# Altium PCB DRUM_IT.PcbDoc
Units mil, origin at the board's own origin, x right, y up, seen from the top; angles counter-clockwise.
Board outline 4080 x 2955 mil, 2 copper layers (Top Layer, Bottom Layer); 63 components, 63 nets, 204 pads, 33 vias.
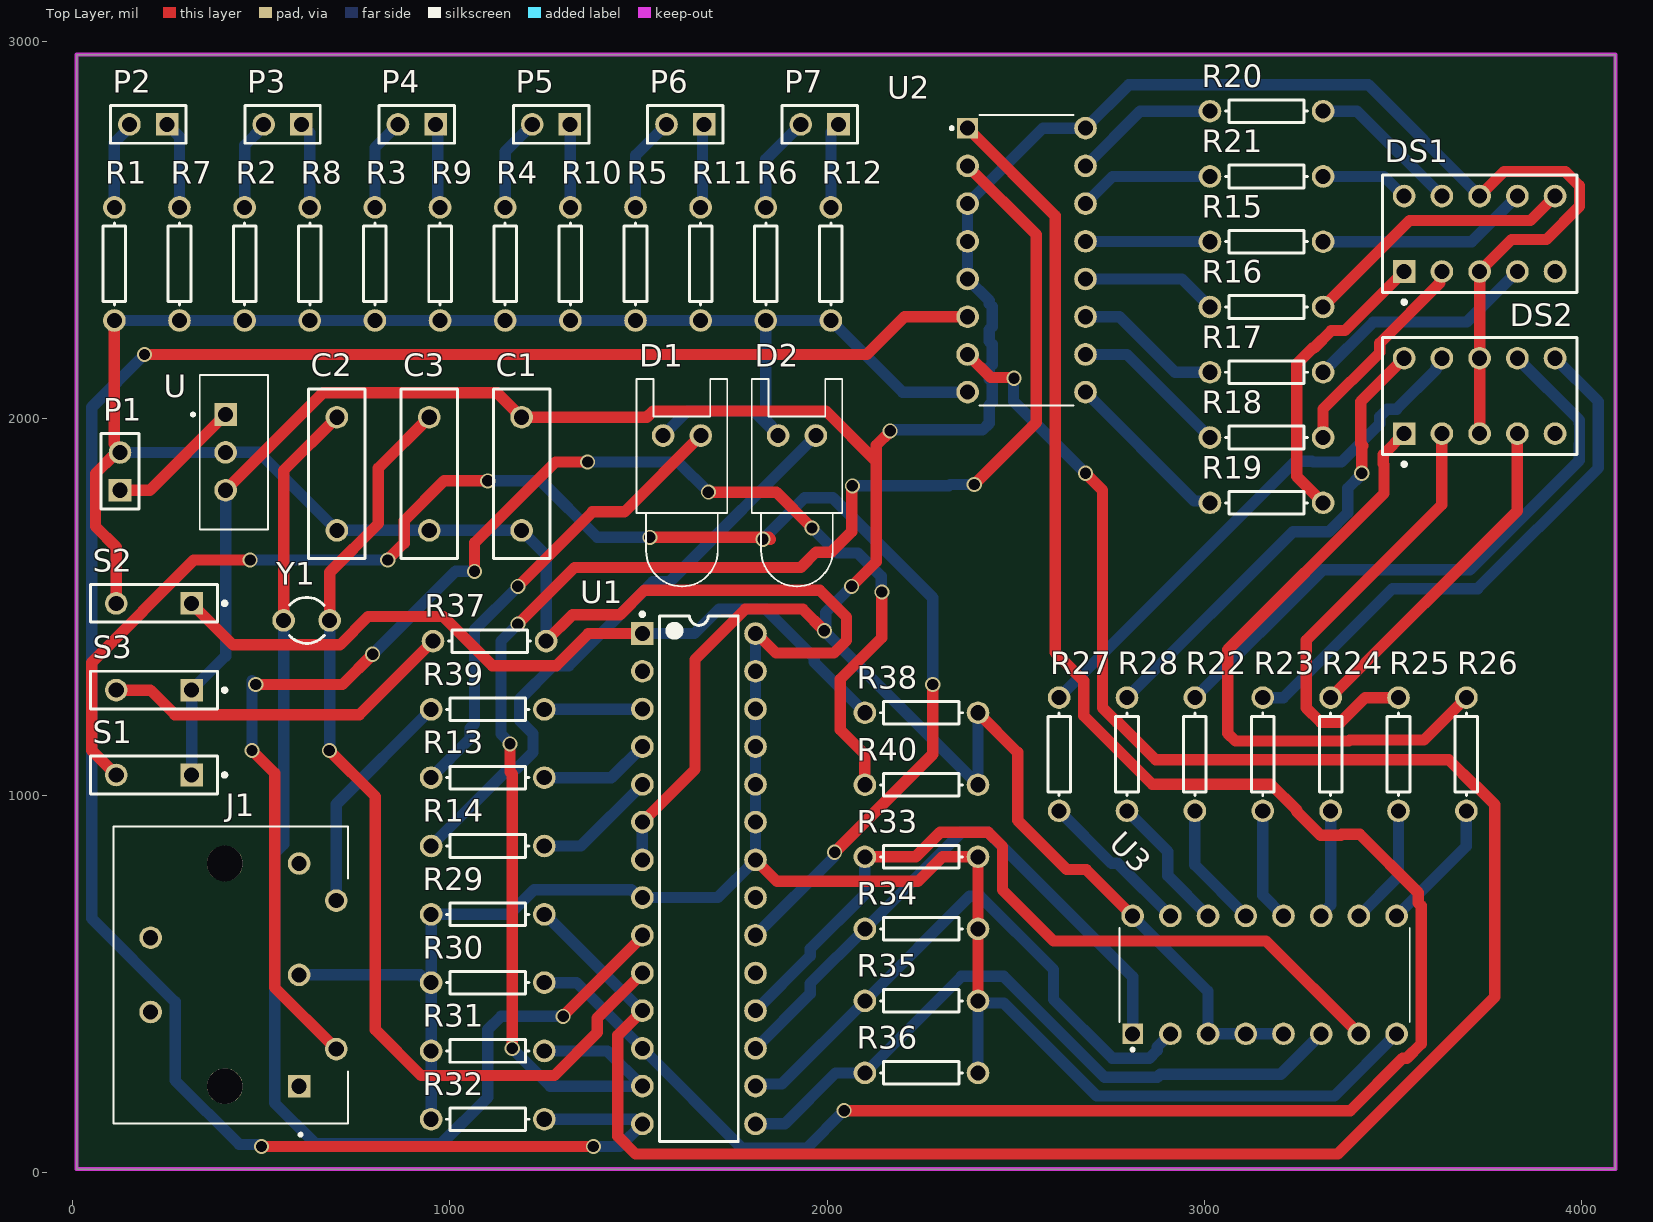
[diagram p0: Top Layer view]
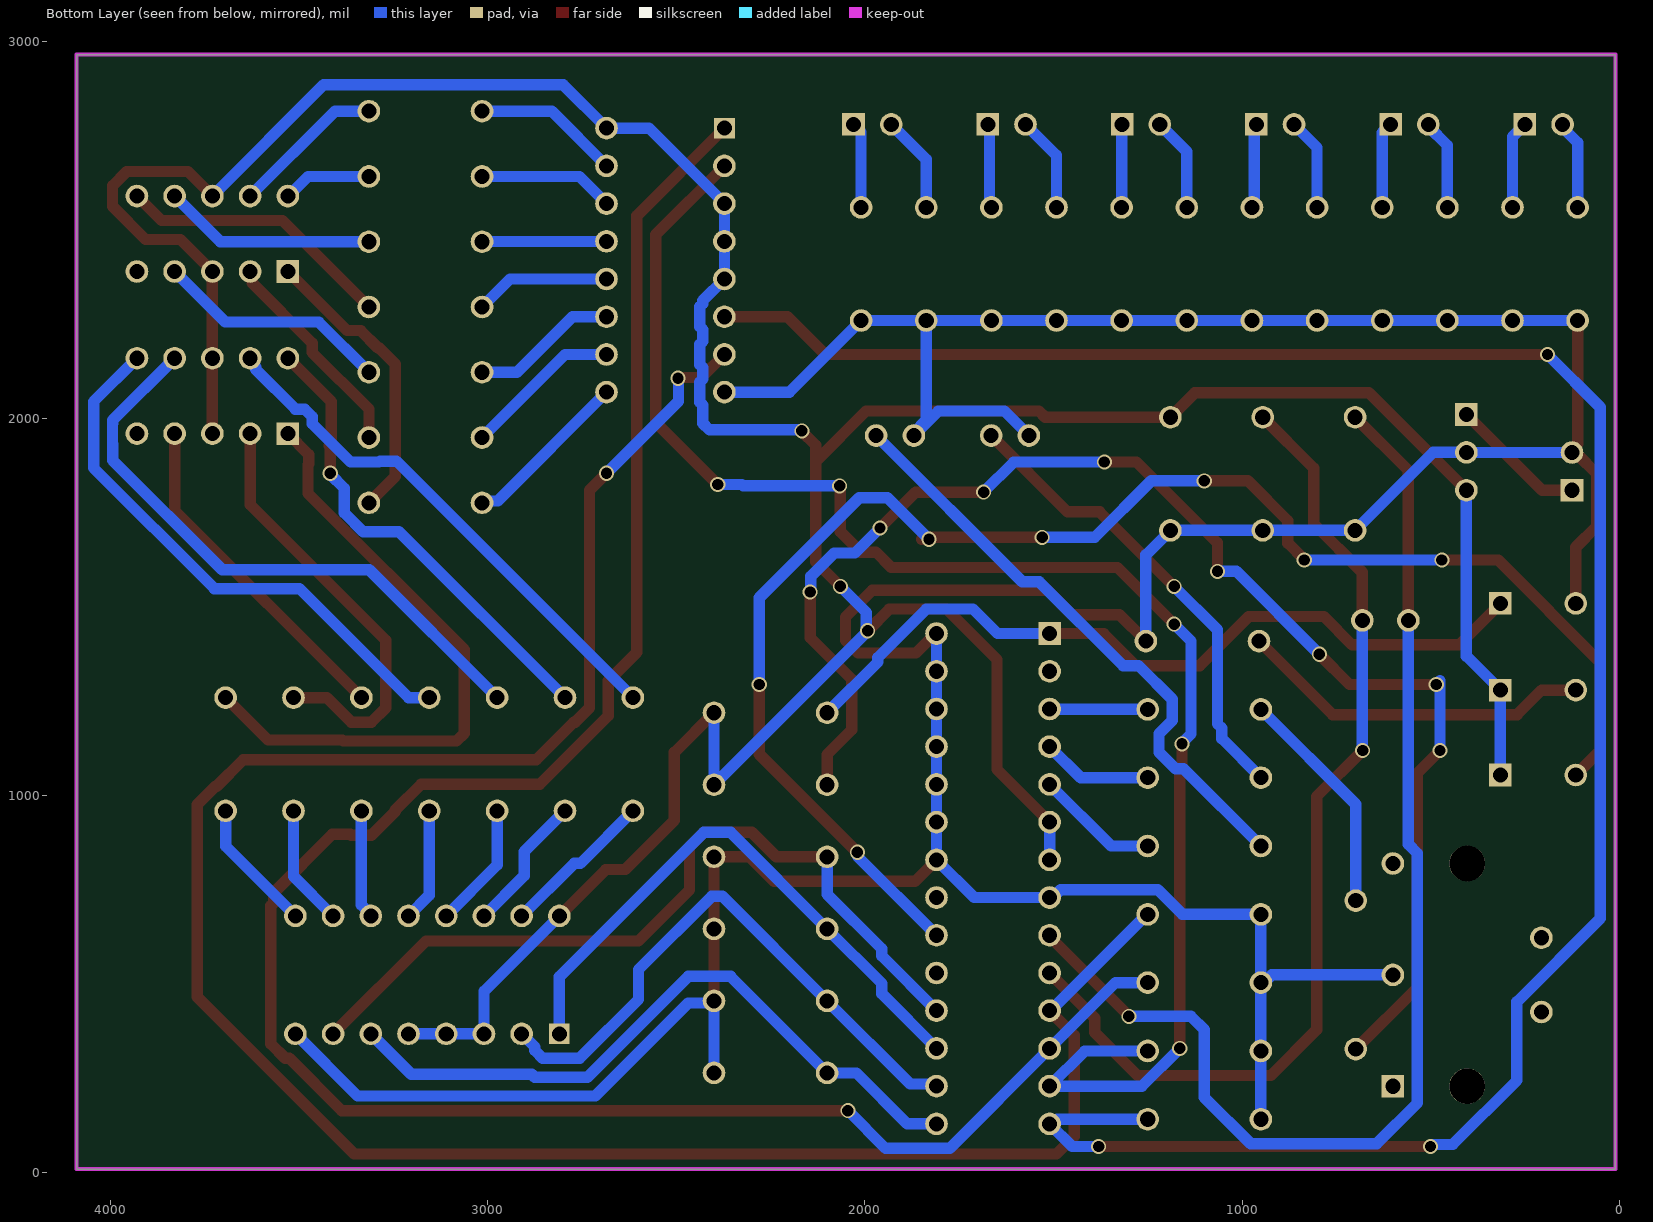
[diagram p1: Bottom Layer view, seen from below]

## Layer stack, top to bottom
Top Solder: solder mask 0.4, Solder Resist, Dk 3.5
Top Layer: signal copper 1.4
Dielectric 1: dielectric 12.6, FR-4, Dk 4.8
Bottom Layer: signal copper 1.4
Bottom Solder: solder mask 0.4, Solder Resist, Dk 3.5

## Board outline
10,10 4090,10 4090,2965 10,2965

## Design rules (kind name [scope] priority, off if disabled: settings)
BoardOutlineClearance [All] p1: gap=7.87 ignorepadtopadclearanceinfootprint=FALSE except(15.75: Arc-SplitBarrior Arc-SplitContinuation Track-SplitBarrior Track-SplitContinuation SMDPad-SplitBarrior SMDPad-SplitContinuation THPad-SplitBarrior THPad-SplitContinuation Via-SplitBarrior Via-SplitContinuation Fill-SplitBarrior Fill-SplitContinuation Poly-SplitBarrior Poly-SplitContinuation Region-SplitBarrior Region-SplitContinuation Text-SplitBarrior Text-SplitContinuation)
Clearance "Clearance Bottom Layer" [OnLayer('Bottom Layer')] p1: gap=8 ignorepadtopadclearanceinfootprint=TRUE except(10: Arc-Text Track-Text SMDPad-Text THPad-Text Via-Text Fill-Text Poly-Text Region-Text Text-Text)
Clearance "Clearance Top Layer" [OnLayer('Top Layer')] p2: gap=8 ignorepadtopadclearanceinfootprint=TRUE except(10: Arc-Text Track-Text SMDPad-Text THPad-Text Via-Text Fill-Text Poly-Text Region-Text Text-Text)
Clearance [All] p3: gap=7.87 ignorepadtopadclearanceinfootprint=FALSE except(3.5: Arc-Arc Arc-Track Arc-SMDPad Track-Track Track-SMDPad SMDPad-SMDPad; 5: Arc-Via Track-Via SMDPad-Via THPad-Via Via-Via; 10: Arc-Text Track-Text SMDPad-Text THPad-Text Via-Text Fill-Text Poly-Text Region-Text Text-Text)
HoleSize [All] p1: absolutevalues=TRUE maxlimit=248.03 minlimit=7.87 maxpercent=80.000 minpercent=20.000
MinimumAnnularRing [All] p1: minimumring=3
MinimumSolderMaskSliver [All] p1: minsoldermaskwidth=3.94
PolygonConnect PolygonConnect_1 [All] p1: thpad.connectstyle=Relief thpad.reliefconductorwidth=20 thpad.reliefentries=4 thpad.polygonreliefangle="90 Angle" thpad.airgapwidth=10 smdpad.connectstyle=Relief smdpad.reliefconductorwidth=20 smdpad.reliefentries=4 smdpad.polygonreliefangle="90 Angle" smdpad.airgapwidth=10 via.connectstyle=Direct via.reliefconductorwidth=20 via.reliefentries=4 via.polygonreliefangle="90 Angle" via.airgapwidth=10
RoutingCorners [All] p1: cornerstyle=Round minsetback=100 maxsetback=100
RoutingVias [All] p1: holewidth=19.68 width=39.37 viastyle="Through Hole" minholewidth=7.87 minwidth=17.72 maxholewidth=39.37 maxwidth=78.74
SilkToSilkClearance [All] p1: silktosilkclearance=3.94
SilkToSolderMaskClearance [IsPad] p1: minsilkscreentomaskgap=3.94 clearancetoexposedcopper=TRUE
SolderMaskExpansion [All] p1: expansion=4 istentingtop=FALSE
Width [All] p1: maxlimit=100 minlimit=3.5 preferedwidth=15
25 further rules are at their usual default settings.

## Components (designator, comment, footprint, x,y, rotation, side; value= is the part's Value field where it differs from the comment)
C1 "Cap" RAD-0.3 1190,1853.56 r90 top value=10uF
C2 "Cap" RAD-0.3 700,1853.56 r90 top value=22pF
C3 "Cap" RAD-0.3 945,1853.56 r270 top value=22pF
D1 "LED0" LED-0 1615,1955 r0 top
D2 "LED0" LED-0 1920,1955 r0 top
DS1 "Dpy Amber-CA" A 3730,2490 r90 top
DS2 "Dpy Amber-CA" A 3730,2060 r90 top
J1 "SDS-50J" CUI_SDS-50J 403.15,525 r270 top
P1 "Header 2" HDR1X2 125,1810 r90 top
P2 "Header 2" HDR1X2 250,2780 r180 top
P3 "Header 2" HDR1X2 606,2780 r180 top
P4 "Header 2" HDR1X2 962,2780 r180 top
P5 "Header 2" HDR1X2 1318,2780 r180 top
P6 "Header 2" HDR1X2 1674,2780 r180 top
P7 "Header 2" HDR1X2 2030,2780 r180 top
R1 "Res1" AXIAL-0.3 110,2410 r90 top value=100k
R2 "Res1" AXIAL-0.3 455.45,2410 r90 top value=100k
R3 "Res1" AXIAL-0.3 800.91,2410 r90 top value=100k
R4 "Res1" AXIAL-0.3 1146.36,2410 r90 top value=100k
R5 "Res1" AXIAL-0.3 1491.82,2410 r90 top value=100k
R6 "Res1" AXIAL-0.3 1837.27,2410 r90 top value=100k
R7 "Res1" AXIAL-0.3 282.73,2410 r90 top value=100k
R8 "Res1" AXIAL-0.3 628.18,2410 r90 top value=100k
R9 "Res1" AXIAL-0.3 973.64,2410 r90 top value=100k
R10 "Res1" AXIAL-0.3 1319.09,2410 r90 top value=100k
R11 "Res1" AXIAL-0.3 1664.54,2410 r90 top value=100k
R12 "Res1" AXIAL-0.3 2010,2410 r90 top value=100k
R13 "Res1" AXIAL-0.3 1100,1047.75 r0 top value=470
R14 "Res1" AXIAL-0.3 1100,866.63 r0 top value=470
R15 "Res1" AXIAL-0.3 3165,2468.89 r0 top value=220
R16 "Res1" AXIAL-0.3 3165,2295.83 r0 top value=220
R17 "Res1" AXIAL-0.3 3165,2122.78 r0 top value=220
R18 "Res1" AXIAL-0.3 3165,1949.72 r0 top value=220
R19 "Res1" AXIAL-0.3 3165,1776.67 r0 top value=220
R20 "Res1" AXIAL-0.3 3165,2815 r0 top value=220
R21 "Res1" AXIAL-0.3 3165,2641.94 r0 top value=220
R22 "Res1" AXIAL-0.3 2975,1110 r90 top value=220
R23 "Res1" AXIAL-0.3 3155,1110 r90 top value=220
R24 "Res1" AXIAL-0.3 3335,1110 r90 top value=220
R25 "Res1" AXIAL-0.3 3515,1110 r90 top value=220
R26 "Res1" AXIAL-0.3 3695,1110 r90 top value=220
R27 "Res1" AXIAL-0.3 2615,1110 r90 top value=220
R28 "Res1" AXIAL-0.3 2795,1110 r90 top value=220
R29 "Res1" AXIAL-0.3 1100,685.51 r0 top value=1k
R30 "Res1" AXIAL-0.3 1100,504.39 r0 top value=1k
R31 "Res1" AXIAL-0.3 1100,323.27 r0 top value=1k
R32 "Res1" AXIAL-0.3 1100,142.14 r0 top value=1k
R33 "Res1" AXIAL-0.3 2250,838 r180 top value=1k
R34 "Res1" AXIAL-0.3 2250,647 r180 top value=1k
R35 "Res1" AXIAL-0.3 2250,456 r180 top value=1k
R36 "Res1" AXIAL-0.3 2250,265 r180 top value=1k
R37 "Res1" AXIAL-0.3 1105,1410 r180 top value=1k
R38 "Res1" AXIAL-0.3 2250,1220 r0 top value=10k
R39 "Res1" AXIAL-0.3 1100,1228.88 r0 top value=220
R40 "Res1" AXIAL-0.3 2250,1029 r180 top value=220
S1 "SW-SPST" SPST-2 215,1055 r180 top
S2 "SW-SPST" SPST-2 215,1510 r180 top
S3 "SW-SPST" SPST-2 215,1280 r180 top
U "L7805CV" TO255P1040X460X1968-3 405,2010.79 r270 top
U1 "ATmega328-PU" 28P3 1660,780 r0 top
U2 "SN74LS247N" DIP794W45P254L1969H508Q16#1 2528.7,2420 r0 top
U3 "SN74LS247N" DIP794W45P254L1969H508Q16#2 3160,525 r90 top
Y1 "XTAL" R38 620,1465 r90 top

## Footprints (in the part's own frame and the unit in brackets; to place one, negate y for a bottom-side part, rotate by r counter-clockwise, add the part's x,y. Pads: shape width x height; smd on the part's side, far side on the other; paste and mask are expansions set on the pad)
28P3 [mil] "28-Pin Plastic Dual In-Line Package (PDIP)"
  rect 60x60 hole 40: 1(-150,650)
  round 60 hole 40: 2(-150,550) 3(-150,450) 4(-150,350) 5(-150,250) 6(-150,150) 7(-150,50) 8(-150,-50) 9(-150,-150) 10(-150,-250) 11(-150,-350) 12(-150,-450) 13(-150,-550) 14(-150,-650) 15(150,-650) 16(150,-550) 17(150,-450) 18(150,-350) 19(150,-250) 20(150,-150) 21(150,-50) 22(150,50) 23(150,150) 24(150,250) 25(150,350) 26(150,450) 27(150,550) 28(150,650)
  silkscreen extent -155,-697 104,706, body extent -142,-695 142,695, height 180
A [mil] "LED, 7-Segment Display, 7.62 mm, RHD; 10 Leads; Row Space 5.08 mm; Pitch 2.54 mm"
  rect 60x60 hole 40: 1(-100,200)
  round 60 hole 40: 2(-100,100) 3(-100,0) 4(-100,-100) 5(-100,-200) 6(100,-200) 7(100,-100) 8(100,0) 9(100,100) 10(100,200)
  silkscreen extent -186,-258 156,258, body extent -156,-258 156,258, height 250
AXIAL-0.3 [mil] "Axial Device, Thru-Hole; 2 Leads; 0.3 in Pin Spacing"
  round 60 hole 40: 1(-150,0) 2(150,0)
  silkscreen extent -109,-30 109,30
CUI_SDS-50J [mil]
  rect 60x60 hole 40: 1(295.28,196.85)
  round 60 hole 40: 2(0,196.85) 3(-295.28,196.85) 4(196.85,295.28) 5(-196.85,295.28) E1(-98.43,-196.85) E2(98.43,-196.85)
  round 94.49 hole 94.49 unplated: ""(-295.28,0) ""(295.28,0)
  silkscreen extent -394,-295 428,327
DIP794W45P254L1969H508Q16#1 [mil]
  rect 55x55 hole 40: 1(-156.3,350)
  round 60 hole 40: 2(-156.3,250) 3(-156.3,150) 4(-156.3,50) 5(-156.3,-50) 6(-156.3,-150) 7(-156.3,-250) 8(-156.3,-350) 9(156.3,-350) 10(156.3,-250) 11(156.3,-150) 12(156.3,-50) 13(156.3,50) 14(156.3,150) 15(156.3,250) 16(156.3,350)
  silkscreen extent -202,-385 125,385, body extent -380,-215 380,215, height 200
DIP794W45P254L1969H508Q16#2 [mil]
  rect 55x55 hole 40 paste+0: 1(-156.3,350)
  round 60 hole 40: 2(-156.3,250) 3(-156.3,150) 4(-156.3,50) 5(-156.3,-50) 6(-156.3,-150) 7(-156.3,-250) 8(-156.3,-350) 9(156.3,-350) 10(156.3,-250) 11(156.3,-150) 12(156.3,-50) 13(156.3,50) 14(156.3,150) 15(156.3,250) 16(156.3,350)
  silkscreen extent -202,-385 125,385, body extent -380,-215 380,215, height 200
HDR1X2 [mil] "Connector; Header; 2 Position"
  rect 60x60 hole 40: 1(0,0)
  round 60 hole 40: 2(100,0)
  silkscreen extent -50,-50 150,50
LED-0 [mil] "LED; 2 Leads"
  round 60 hole 40: 1(50,0) 2(-50,0)
  silkscreen extent -120,-400 120,150
R38 [mil] "Crystal, Thru-Hole; 2 Leads; Body 3.1 x 8.2 mm (Dia.xH)"
  round 60 hole 40: 1(0,61.02) 2(0,-61.02)
  silkscreen extent -61,-47 61,46
RAD-0.3 [mil] "Radial Cap, Thru-Hole; 2 Leads; 0.3 in Pin Spacing"
  round 60 hole 40: 1(-150,0) 2(150,0)
  silkscreen extent -225,-75 225,75
SPST-2 [mil] "Switch; 2 Leads"
  rect 60x60 hole 40: 1(-100,0)
  round 60 hole 40: 2(100,0)
  silkscreen extent -192,-50 169,50
TO255P1040X460X1968-3 [mil]
  rect 60x60 hole 40: 1(0,0)
  round 60 hole 40: 2(100.39,0) 3(200.79,0)
  silkscreen extent -104,-90 305,113

## Part data
C1 C2 C3: "Capacitor", LatestRevisionDate=17-Jul-2002, LatestRevisionNote="Re-released for DXP Platform.", PackageDescription="Radial Cap, Thru-Hole; 2 Leads; 0.3 in Pin Spacing", PackageReference=RAD-0.3, Published=8-Jun-2000, Publisher="Altium Limited"
D1 D2: "Typical INFRARED GaAs LED", LatestRevisionDate=08-Jul-2005, LatestRevisionNote="Mech Layer 1 removed.", PackageDescription="LED; 2 Leads", PackageReference=LED-0, Published=8-Jun-2000, Publisher="Altium Limited"
DS1 DS2: "7.62 mm Black Surface Orange 7-Segment Display: CA, RH DP", Colour=Orange, ComponentLink1Description="Manufacturer Link", ComponentLink1URL=http://www.agilent.com/, DatasheetVersion=19-Feb-2002, LatestRevisionDate=17-Dec-2003, LatestRevisionNote="Schematic revised, PCB Footprint replaced.", MinimumIntensity="354 ucd", Note="IF = 5 mA", PackageDescription="LED, 7-Segment Display, 7.62 mm, RHD; 10 Leads; Row Space 5.08 mm; Pitch 2.54 mm", PackageReference=A, PackageVersion=11-Feb-2002, Published=8-Jun-2000, Publisher="Altium Limited"
J1: Package=None, Availability=Unavailable, MP=SDS-50J, Price=None
P1 P2 P3 P4 P5 P6 P7: "Header, 2-Pin", LatestRevisionDate=17-Jul-2002, LatestRevisionNote="Re-released for DXP Platform.", Publisher="Altium Limited"
R1 R2 R3 R4 R5 R6 R7 R8 R9 R10 R11 R12 R13 R14 R15 R16 R17 R18 R19 R20 R21 R22 R23 R24 R25 R26 R27 R28 R29 R30 R31 R32 R33 R34 R35 R36 R37 R38 R39 R40: "Resistor", LatestRevisionDate=17-Jul-2002, LatestRevisionNote="Re-released for DXP Platform.", PackageDescription="Axial Device, Thru-Hole; 2 Leads; 0.3 in Pin Spacing", PackageReference=AXIAL-0.3, Published=8-Jun-2000, Publisher="Altium Limited"
S1 S2 S3: "Single-Pole, Single-Throw Switch", LatestRevisionDate=17-Jul-2002, LatestRevisionNote="Re-released for DXP Platform.", PackageDescription="Switch; 2 Leads", PackageReference=SPST-2, Published=24-Mar-1999, Publisher="Altium Limited"
U: "Linear Voltage Regulator IC 1 Output 1.5A TO-220AB", Package="TO-220 STMicroelectronics", Availability=Unavailable, MF=STMicroelectronics, MP=L7805CV, Price=None, SnapEDA_Link=https://www.snapeda.com/parts/L7805CV/STMicroelectronics/view-part/501150/?ref=snap
U1: library part CMP-0095-00015-2, "8-bit AVR Microcontroller, 32KB Flash, 1KB EEPROM, 2KB SRAM, 28-pin PDIP, Industrial Grade (-40°C to 85°C)", ComponentLink1Description="Manufacturer URL", ComponentLink1URL=http://www.atmel.com/, ComponentLink2Description="ATmega48A/48PA/88A/88PA/168A/168PA/328/328P Datasheet", ComponentLink2URL=http://www.atmel.com/dyn/resources/prod_documents/8271.pdf, ComponentLink3Description="ATmega48A/48PA/88A/88PA/168A/168PA/328/328P Summary", ComponentLink3URL=http://www.atmel.com/dyn/resources/prod_documents/8271S.pdf, DatasheetVersion="revD, May-2011", PackageDescription="28-lead (0.300\"/7.62mm Wide) Plastic Dual Inline Package (PDIP)", PackageReference=28P3, PackageVersion="revB, Sep-2001", RevisionNote="DatasheetVersion updated. URLs added."
U2 U3: "BCD-To-Seven-Segment Decoders/Drivers 16-PDIP 0 to 70", Package="PDIP-16 Texas Instruments", Check_prices=https://www.snapeda.com/parts/SN74LS247N/Texas%20Instruments/view-part/230215/?ref=eda, Digi-Key_Part_Number=296-28943-2-ND, MF="Texas Instruments", MP=SN74LS247N, Purchase-URL=https://pricing.snapeda.com/search/part/SN74LS247N/?ref=eda, SnapEDA_Link=https://www.snapeda.com/parts/SN74LS247N/Texas%20Instruments/view-part/230215/?ref=snap
Y1: "Crystal Oscillator", LatestRevisionDate=17-Jul-2002, LatestRevisionNote="Re-released for DXP Platform.", PackageDescription="Crystal, Thru-Hole; 2 Leads; Body 3.1 x 8.2 mm (Dia.xH)", PackageReference=R38, Published=8-Jun-2000, Publisher="Altium Limited"

## Via types
v1: diameter 40, hole 30, Top Layer to Bottom Layer, 33 vias

## Nets (pads, with @x,y where several pads share a name; then routed paths per layer and width w, separated by ;. In a path a pad name is that pad's centre, name@x,y a point inside that pad or via, vN(x,y) a via of type N, cw(c..) or ccw(c..) an arc to the next point about the centre after c; other vN are vias at no path point)
GND: C1.1 C2.1 C3.2 D1.2 D2.2 J1.2 P1.2 R1.1 R2.1 R3.1 R4.1 R5.1 R6.1 R7.1 R8.1 R9.1 R10.1 R11.1 R12.1 R29.1 R30.1 R31.1 R32.1 R33.1 R34.1 R35.1 R36.1 R37.1 S2.2 U1.8 U1.22 U1.23 U1.24 U1.25 U1.26 U1.27 U1.28 U2.8 U3.8 U.2 | length 11456.9
  Top Layer w30: R1.1 110,1933.12 125,1918.12 P1.2 119.26,1904.26 109.76,1904.26 60,1854.5 60,1713.81 115,1658.81 S2.2 ; R37.1 1325,1480 1450.5,1480 1515.5,1545 1980,1545 2051.5,1473.5 2051.5,1411.6 2018.4,1378.5 1864.57,1378.5 1813.07,1430 U1.28 ; U1.22 1867,773 2240.73,773 2305.73,838 R33.1 R34.1 R35.1
  Bottom Layer w30: R1.1 R7.1 R2.1 R8.1 R3.1 R9.1 R4.1 R10.1 R5.1 R11.1 R6.1 ; P1.2 125.2,1910.2 404.8,1910.2 U.2 493.17,1910.39 C2.1 C3.2 C1.1 1255,1638.56 R37.1 ; J1.2 921.27,525 941.88,504.39 R30.1 ; R32.1 R31.1 R30.1 ; D1.2 1630,2020 1805,2020 D2.2 1870,1963.12 1837.27,1995.85 R6.1 ; U1.28 U1.27 U1.26 U1.25 U1.24 U1.23 U1.22 1710,730 U1.8 1501.88,730 1481.37,750.51 1223.08,750.51 1158.08,685.51 R29.1 R30.1 ; U2.8 2200,2070 R12.1 R6.1 ; R36.1 R35.1 2405.74,450.26 2468.32,450.26 2714.88,203.7 3345,203.7 U3.8
NetC1_2: C1.2 DS1.3 DS1.8 DS2.3 DS2.8 R38.2 R40.1 S1.1 S3.1 U1.6 U1.7 U2.3 U2.4 U2.5 U2.16 U3.3 U3.4 U3.5 U3.16 U.3 | length 10064
  Top Layer w30: U.3 663.56,2068.56 1125,2068.56 C1.2 1521.64,2003.56 1538.08,2020 1996.92,2020 2130,1886.92 ; U1.6 1649.42,1069.42 1649.42,1361.34 1783.08,1495 1935,1495 v1(1992.5,1437.5) ; v1(2065,1555) 2130,1620 2130,1886.92 ; v1(2167.2,1967.49) 2167.2,1966.13 2130,1928.93 2130,1886.92 ; R38.2 2505,1115 2505,935 2635.46,804.54 2686.76,804.54 U3.16 ; DS2.3 DS2.8 DS1.3 3815,2475 3906.92,2475 3995,2563.08 3995,2616.92 3956.92,2655 3795,2655 DS1.8
  Bottom Layer w30: S1.1 S3.1 405,1370 U.3 ; U1.7 U1.6 ; v1(1992.5,1437.5) 1992.5,1436.5 R40.1 R38.2 ; v1@1995.96,1435.96 1995.96,1485.96 v1(2065,1555) ; v1(2167.2,1967.49) 2168.55,1967.49 2171.07,1970 2412.07,1970 2429.65,1987.57 2429.65,2035.32 2437.4,2043.08 2437.4,2096.92 2429.65,2104.68 2429.65,2135.32 2437.4,2143.08 2437.4,2196.92 2429.65,2204.68 2429.65,2235.32 2437.4,2243.08 2437.4,2296.92 2429.65,2304.68 2429.65,2312.76 U2.5 U2.4 U2.3 2572.4,2770 U2.16 2800,2885 3435,2885 DS1.8 ; U3.16 3010,481.3 U3.3 U3.4 U3.5
NetC2_2: C2.2 U1.9 Y1.1 | length 3243.7
  Top Layer w30: Y1.1 558.98,1862.54 C2.2 ; v1(1300,415) 1300,416.35 1510,626.35 U1.9
  Bottom Layer w30: Y1.1 558.98,871.18 535,847.2 535,185.23 643.08,77.14 976.92,77.14 1100,200.22 1100,380 1135,415 v1(1300,415)
NetC3_1: C3.1 U1.10 Y1.2 | length 2677.9
  Top Layer w30: v1(680,1120) 802.02,997.98 802.02,379.33 923.08,258.27 1276.92,258.27 1390.58,371.92 1390.58,410.58 U1.10 ; Y1.2 681.02,1592.66 810.14,1721.78 810.14,1868.7 C3.1
  Bottom Layer w30: v1(680,1120) 681.02,1121.02 Y1.2
NetD1_1: D1.1 R13.1 | length 1253.2
  Top Layer w30: v1(1180,1555) 1377.6,1752.6 1462.6,1752.6 D1.1
  Bottom Layer w30: R13.1 1053.5,1151.25 1053.5,1179.11 1064.97,1190.58 1064.97,1439.97 v1(1180,1555)
NetD2_1: D2.1 R14.1 | length 1602.7
  Bottom Layer w30: R14.1 1154.97,1071.6 1176.5,1071.6 1220,1115.1 1220,1164.45 1185,1199.45 1185,1255.8 1274.2,1345 1315.5,1345 1538.01,1567.5 1582.5,1567.5 D2.1
NetDS1_1: DS1.1 R19.2 | length 783.6
  Top Layer w30: R19.2 3245,1846.67 3245,2144.7 3288.08,2187.78 3291.53,2187.78 3337.02,2233.27 3373.27,2233.27 DS1.1
NetDS1_2: DS1.2 R18.2 | length 570.8
  Top Layer w30: R18.2 3315,2025 3465.47,2175.47 3465.47,2200.47 3624.26,2359.26 3624.26,2384.26 DS1.2
NetDS1_4: DS1.4 R17.2 | length 625.7
  Bottom Layer w30: R17.2 3448.23,2256.01 3696.01,2256.01 DS1.4
NetDS1_6: DS1.6 R16.2 | length 736.8
  Top Layer w30: R16.2 3544.17,2525 3865,2525 DS1.6
NetDS1_7: DS1.7 R15.2 | length 565.2
  Bottom Layer w30: R15.2 3708.89,2468.89 DS1.7
NetDS1_9: DS1.9 R20.2 | length 408.2
  Bottom Layer w30: R20.2 3405,2815 DS1.9
NetDS1_10: DS1.10 R21.2 | length 236.5
  Bottom Layer w30: R21.2 3476.55,2641.94 3528.49,2590 DS1.10
NetDS2_1: DS2.1 R26.2 | length 1678.6
  Top Layer w30: DS2.1 3474.88,1904.88 3474.88,1880.03 3476.45,1878.45 3476.45,1801.45 3062.2,1387.2 3062.2,1165.37 3082.57,1145 3382.63,1145 3385.43,1147.8 3582.8,1147.8 R26.2
NetDS2_2: DS2.2 R25.2 | length 1163.7
  Top Layer w30: R25.2 3426.92,1260 3361.92,1195 3308.08,1195 3270,1233.08 3270,1411.89 3630,1771.89 DS2.2
NetDS2_4: DS2.4 R24.2 | length 905
  Top Layer w30: R24.2 3830,1755 DS2.4
NetDS2_6: DS2.6 R23.2 | length 1480.7
  Bottom Layer w30: R23.2 3210,1260 3499.04,1549.04 3724.75,1549.04 4045,1869.29 4045,2045 DS2.6
NetDS2_7: DS2.7 R22.2 | length 1619.3
  Bottom Layer w30: R22.2 3314.04,1599.04 3704.04,1599.04 3994.53,1889.53 3994.53,1932.6 3995,1933.08 3995,1986.92 3994.53,1987.4 3994.53,1995.47 DS2.7
NetDS2_9: DS2.9 R27.2 | length 1409.4
  Bottom Layer w30: R27.2 3242.16,1887.16 3285.64,1887.16 3288.08,1884.72 3363.69,1884.72 3465,1986.04 3465,2004.5 3485.5,2025 3510,2025 3615,2130 3615,2136.88 3630,2151.88 DS2.9
NetDS2_10: DS2.10 R28.2 | length 1264.3
  Top Layer w30: v1(3417.45,1855.05) 3417.45,1925.1 3419.95,1927.6 3415,1932.55 3415,2045 DS2.10
  Bottom Layer w30: R28.2 3235,1700 3330.26,1700 3380,1749.74 3380,1814.89 3417.45,1852.34 v1(3417.45,1855.05)
NetJ1_4: J1.4 R40.2 | length 3782
  Top Layer w30: v1(475,1120) 535,1060 535,491.57 J1.4 ; v1(485,1295) 715,1295 v1(795,1375) ; v1(1065,1595) 1065,1670.49 1279.51,1885 v1(1365,1885) ; v1(1685,1805) 1865,1805 v1(1960,1710) ; R40.2 2100,1109.52 2035,1174.52 2035,1309.08 2145,1419.08 v1(2145,1540)
  Bottom Layer w30: v1(475,1120) 475,1305 v1(485,1295) ; v1(795,1375) 1015,1595 v1(1065,1595) ; v1(1365,1885) 1605,1885 v1(1685,1805) ; v1(1960,1710) 2026.28,1643.72 2081.28,1643.72 2143.09,1581.91 2143.09,1541.91 v1(2145,1540)
NetJ1_5: J1.5 R39.1 | length 611.2
  Bottom Layer w30: J1.5 698.43,977.3 R39.1
NetP1_1: P1.1 U.1 | length 363.2
  Top Layer w30: P1.1 204.21,1810 U.1
NetP2_1: P2.1 R7.2 | length 233.6
  Bottom Layer w30: P2.1 282.73,2747.27 R7.2
NetP2_2: P2.2 R1.2 | length 236.6
  Bottom Layer w30: R1.2 110,2731.88 150,2771.88 P2.2
NetP3_1: P3.1 R8.2 | length 229.2
  Bottom Layer w30: P3.1 628.18,2757.82 R8.2
NetP3_2: P3.2 R2.2 | length 240.9
  Bottom Layer w30: R2.2 455.45,2724.48 506,2775.03 P3.2
NetP4_1: P4.1 R9.2 | length 224.8
  Bottom Layer w30: P4.1 967.9,2774.1 967.9,2565.74 R9.2
NetP4_2: P4.2 R3.2 | length 245.3
  Bottom Layer w30: R3.2 800.91,2718.91 P4.2
NetP5_1: P5.1 R10.2 | length 220.5
  Bottom Layer w30: P5.1 1318.55,2779.45 1318.55,2560.55 R10.2
NetP5_2: P5.2 R4.2 | length 249.7
  Bottom Layer w30: R4.2 1146.36,2708.36 P5.2
NetP6_1: P6.1 R11.2 | length 223.9
  Bottom Layer w30: R11.2 1669.27,2564.73 1669.27,2775.27 P6.1
NetP6_2: P6.2 R5.2 | length 254
  Bottom Layer w30: R5.2 1491.82,2697.82 P6.2
NetP7_1: P7.1 R12.2 | length 228.3
  Bottom Layer w30: R12.2 2010,2760 P7.1
NetP7_2: P7.2 R6.2 | length 258.4
  Bottom Layer w30: R6.2 1837.27,2687.27 P7.2
NetR13_2: R13.2 U1.4 | length 294.1
  Bottom Layer w30: R13.2 1427.75,1047.75 U1.4
NetR14_2: R14.2 U1.5 | length 327.7
  Bottom Layer w30: R14.2 1346.63,866.63 U1.5
NetR15_1: R15.1 U2.13 | length 330.5
  Bottom Layer w30: U2.13 2685.56,2469.44 3014.44,2469.44 R15.1
NetR16_1: R16.1 U2.12 | length 360.7
  Bottom Layer w30: U2.12 2940.83,2370 R16.1
NetR17_1: R17.1 U2.11 | length 391
  Bottom Layer w30: U2.11 2774.95,2270 2922.17,2122.78 R17.1
NetR18_1: R18.1 U2.10 | length 421.2
  Bottom Layer w30: U2.10 2794.72,2170 R18.1
NetR19_1: R19.1 U2.9 | length 451.5
  Bottom Layer w30: U2.9 2973.53,1781.47 3010.19,1781.47 R19.1
NetR20_1: R20.1 U2.15 | length 390.1
  Bottom Layer w30: U2.15 2830,2815 R20.1
NetR21_1: R21.1 U2.14 | length 359.8
  Bottom Layer w30: U2.14 2756.94,2641.94 R21.1
NetR22_1: R22.1 U3.13 | length 334.6
  Bottom Layer w30: R22.1 2975,816.3 U3.13
NetR23_1: R23.1 U3.12 | length 301.5
  Bottom Layer w30: R23.1 3155,736.3 U3.12
NetR24_1: R24.1 U3.11 | length 289.1
  Bottom Layer w30: U3.11 3310,685.22 3335,710.22 R24.1
NetR25_1: R25.1 U3.10 | length 322.2
  Bottom Layer w30: U3.10 3515,786.3 R25.1
NetR26_1: R26.1 U3.9 | length 355.3
  Bottom Layer w30: U3.9 3695,866.3 R26.1
NetR27_1: R27.1 U3.15 | length 410.4
  Bottom Layer w30: R27.1 2754.39,820.61 2770.69,820.61 U3.15
NetR28_1: R28.1 U3.14 | length 367.8
  Bottom Layer w30: R28.1 2903.52,851.48 2903.52,787.78 U3.14
NetR29_2: R29.2 U1.11 U2.7 | length 6020.8
  Top Layer w30: U1.11 1445,365 1445,97 1492,50 3353.93,50 3770,466.07 3770,976.92 3721.92,1025 3718.47,1025 3648.47,1095 2871.53,1095 2771.53,1195 2768.08,1195 2730,1233.08 2730,1810 v1(2685,1855) ; U2.7 2433.69,2108.71 2493.66,2108.71 v1(2495.57,2106.79)
  Bottom Layer w30: R29.2 1252.24,685.51 1507.76,430 U1.11 ; v1(2495.57,2106.79) 2494.2,2105.43 2494.2,2045.8 v1(2685,1855)
NetR30_2: R30.2 U1.12 U2.1 | length 5796.9
  Top Layer w30: v1(2045,165) 3387.25,165 3525.96,303.7 3536.92,303.7 3575,341.78 3575,708.22 3567.24,715.98 3567.24,742.76 3412.56,897.44 3364.36,897.44 3361.92,895 3308.08,895 3245,958.08 3245,961.92 3176.92,1030 2862.37,1030 2680,1212.37 2680,1305 2604.57,1380.43 2604.57,2537.83 U2.1
  Bottom Layer w30: R30.2 1335.61,504.39 U1.12 1775,65 1945,65 v1(2045,165)
NetR31_2: R31.2 U1.13 U2.2 | length 4265.7
  Top Layer w30: v1(1158.91,1137.44) 1158.91,1063.54 1165,1057.44 v1(1165,330) ; v1(1180,1455) 1330,1605 1930,1605 1970.8,1645.8 2010.8,1645.8 2065,1700 2065,1820 v1(2066.72,1821.72) ; U2.2 2554.57,2487.83 2554.57,1989.57 v1(2390,1825)
  Bottom Layer w30: v1(1158.91,1137.44) 1158.91,1140.15 1135,1164.06 1135,1410 v1(1180,1455) ; v1(1165,330) 1265,230 U1.13 1416.73,323.27 R31.2 ; v1@2068.44,1820 v1(2066.72,1821.72) 2322.59,1821.72 2325.87,1825 v1(2390,1825)
NetR32_2: R32.2 U1.14 U2.6 | length 5899.4
  Top Layer w30: v1(190,2170) 2105,2170 2205,2270 U2.6 ; v1(500,70) v1(1380,70)
  Bottom Layer w30: v1(190,2170) 50,2030 50,674.8 271.3,453.5 271.3,245.26 441.56,75 495,75 v1(500,70) ; R32.2 1489.74,142.14 1501.88,130 U1.14 1450,70 v1(1380,70)
NetR33_2: R33.2 U1.18 U3.7 | length 2153.7
  Top Layer w30: R33.2 2235.02,838 2300.02,903 2426.92,903 2465,864.92 2465,750 2600,615 3163.7,615 U3.7
  Bottom Layer w30: U1.18 1955.01,575.01 1955.01,593.93 2100,738.92 R33.2
NetR34_2: R34.2 U1.17 U3.1 | length 1563.1
  Bottom Layer w30: U1.17 1955.01,475.01 1955.01,502.01 R34.2 2356,903 2426.92,903 2810,519.92 U3.1
NetR35_2: R35.2 U1.16 U3.2 | length 1565.2
  Bottom Layer w30: U1.16 1815.74,235.74 1879.74,235.74 R35.2 2377.33,733.33 2405.6,733.33 2600.09,538.83 2600.09,459.91 2756.3,303.7 2854.5,303.7 2875,324.2 2875,333.7 U3.2
NetR36_2: R36.2 U1.15 U3.6 | length 1820.3
  Bottom Layer w30: U1.15 1887.5,130 2022.5,265 R36.2 2356,521 2468.29,521 2735.59,253.7 2875.21,253.7 2882.96,261.46 3202.76,261.46 U3.6
NetR37_2: R37.2 S3.2 | length 947.7
  Top Layer w30: S3.2 205.5,1280 270.5,1215 760,1215 R37.2
NetR38_1: R38.1 S2.1 U1.1 | length 2098.5
  Top Layer w30: S2.1 425,1400 707.95,1400 782.95,1475 981.92,1475 1111.92,1345 1281.92,1345 1366.92,1430 U1.1
  Bottom Layer w30: U1.1 1648.46,1430 1713.46,1495 1836.92,1495 1965.59,1366.33 1965.59,1354.41 R38.1
NetR39_2: R39.2 U1.3 | length 260.5
  Bottom Layer w30: R39.2 1250.56,1229.44 1509.44,1229.44 U1.3
NetS1_2: S1.2 U1.20 | length 4140.1
  Top Layer w30: S1.2 50,1120 50,1353.08 185.25,1488.33 185.25,1489.75 320.5,1625 v1(470,1625) ; v1(835,1625) 835,1626.35 878.38,1669.74 878.38,1728.87 984.51,1835 v1(1100,1835) ; v1(1530,1685) 1845,1685 1850,1680 v1(1830,1680) ; v1(2020,850) 2280,1110 v1(2280,1295)
  Bottom Layer w30: v1(470,1625) v1(835,1625) ; v1(1100,1835) 1240.68,1835 1390.68,1685 v1(1530,1685) ; U1.20 2019.04,839.04 2019.04,849.04 v1(2020,850) ; v1(1830,1680) 1940,1790 2015,1790 2280,1525 v1(2280,1295)
pads on no net: DS1.5 DS2.5 J1. J1.1 J1.3 J1.E1 J1.E2 U1.2 U1.19 U1.21

## Keep-outs
Keep-Out Layer:
  the board outline again, w10